# Altium PCB rk3288_backend.PcbDoc (part 2 of 3)
Units mm, origin at the board's own origin, x right, y up, seen from the top; angles counter-clockwise.
Board outline 46.39 x 100.03 mm, 4 copper layers (Top Layer, horizontal, vertical, Bottom Layer), stack 0.778 mm thick; 208 components, 207 nets, 778 pads, 333 vias.
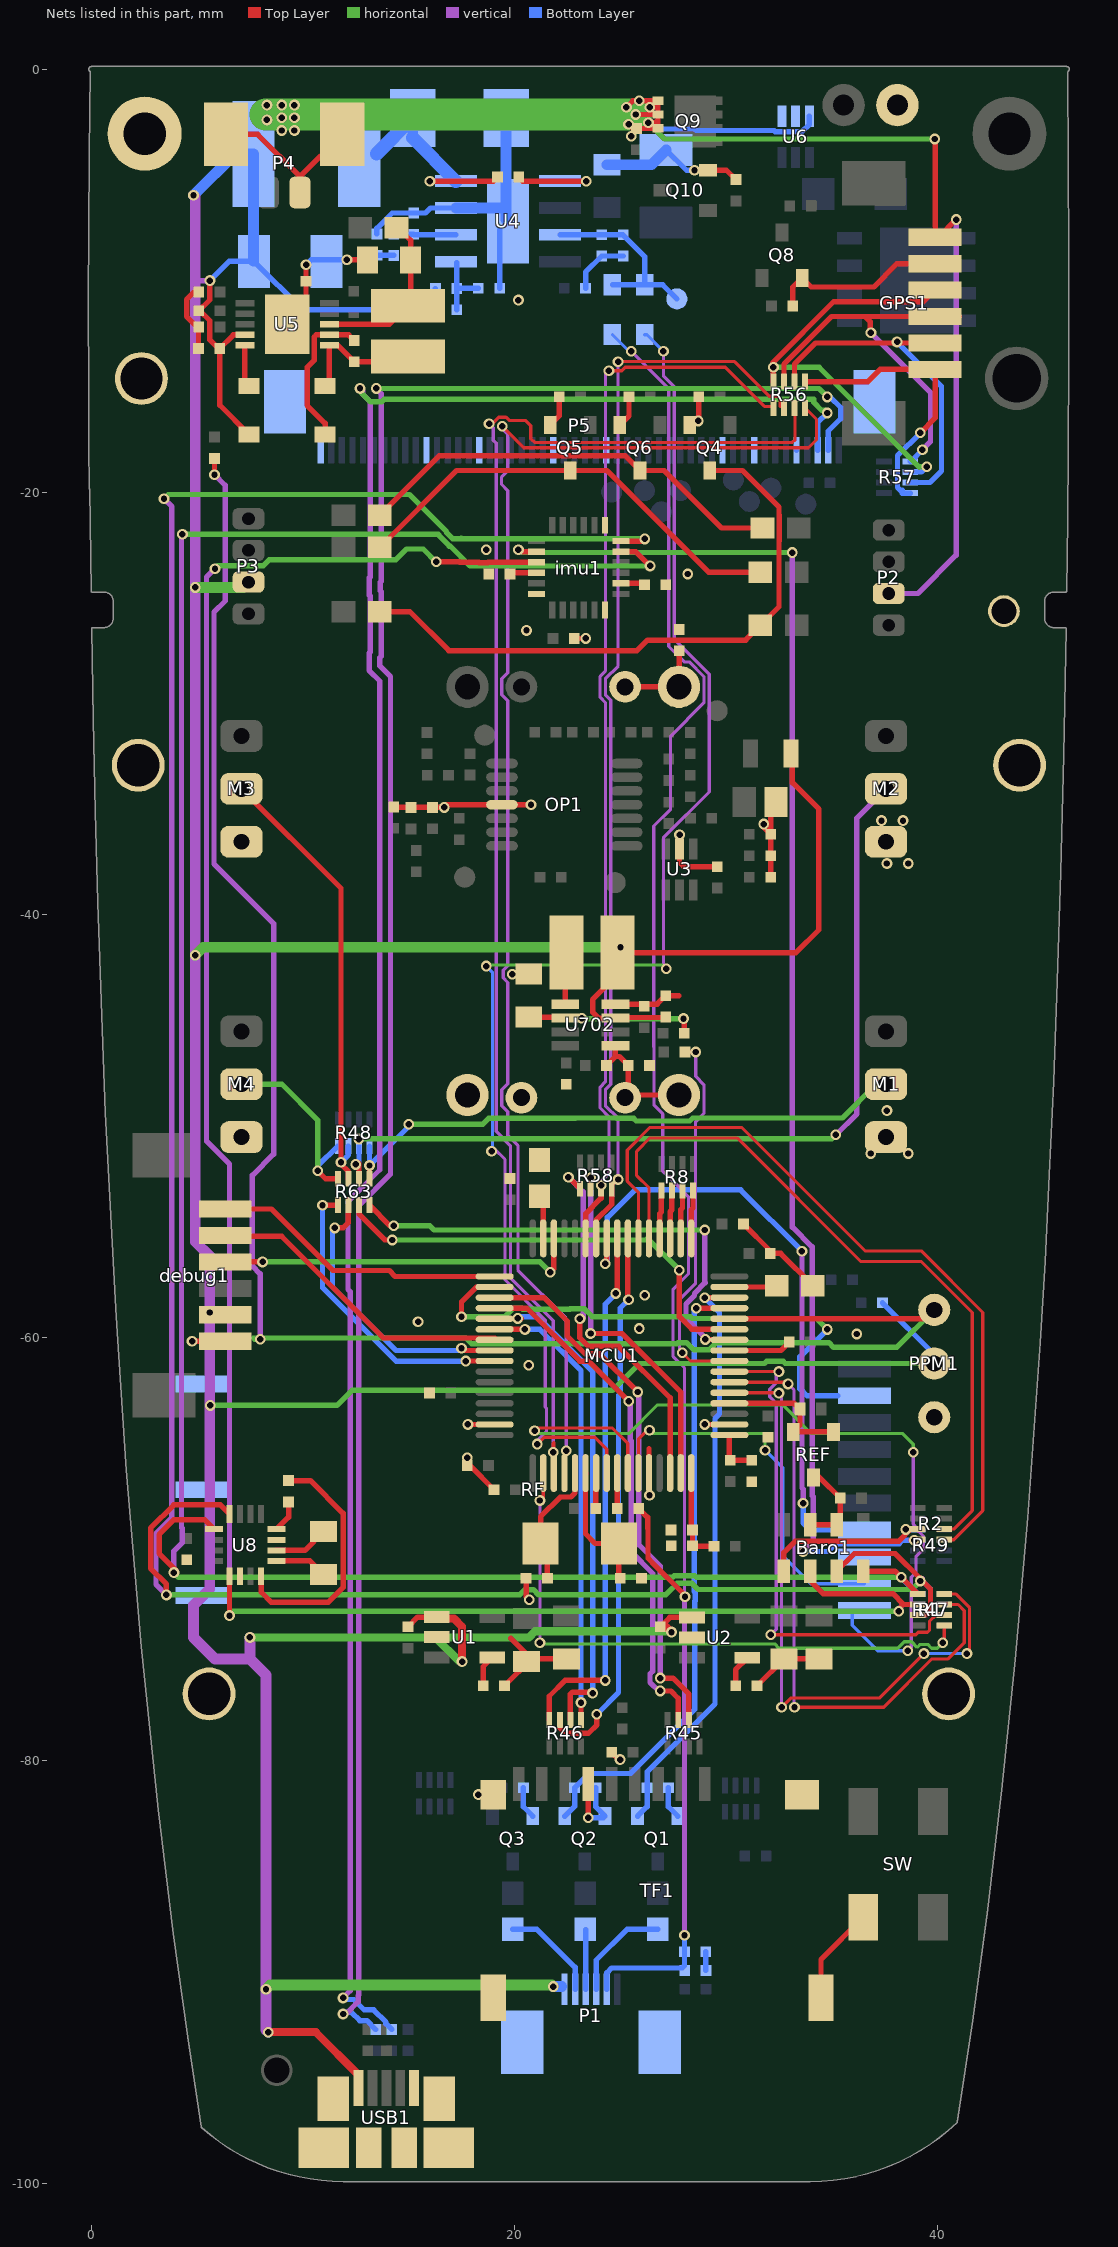
[diagram p4: the nets of this part, all layers, seen from the top]

## Via types
v1: diameter 0.508, hole 0.305, Top Layer to Bottom Layer, 289 vias
v2: diameter 0.508/0.508/0.508/0.508 (per signal layer), hole 0.305, Top Layer to Bottom Layer, 44 vias

## Nets (pads, with @x,y where several pads share a name; then routed paths per layer and width w, separated by ;. In a path a pad name is that pad's centre, name@x,y a point inside that pad or via, vN(x,y) a via of type N, cw(c..) or ccw(c..) an arc to the next point about the centre after c; other vN are vias at no path point) (continued)
5V: C20.1 C21.1 C35.1 C702.1 D5.3 debug1.5 GPS1.1 L1.2 L701.1 P1.6 P2.2 P3.2 PPM1.2 Q9.S R10.1 R11.1 R14.1 R25.1 R41.2 R?.1@37.408,-58.345 rx-L1.1 U1.1 U2.1 U5.4 U6.3 U702.3 USB1.1 | length 332
  Top Layer w0.254: R25.1@5.067,-11.43 R25.1@5.07,-11.43 ; v1(5.588,-58.801) 5.695,-58.908 debug1.5@6.329,-58.908 ; v1(5.6,-10) 5.6,-10.178 5.593,-10.185 5.593,-10.907 R25.1@5.07,-11.43 ; C35.1@6.008,-13.208 5.6,-12.8 5.6,-12.555 5.593,-12.548 5.593,-11.886 5.137,-11.43 R25.1@5.07,-11.43 ; U5.4@7.25,-12.565 6.71,-12.565 C35.1@6.067,-13.208 6.067,-15.889 D5.3@7.45,-17.272 ; R10.1@14.965,-73.668 15.428,-73.205 U1.1@16.332,-73.205 ; L701.1@24.871,-42.829 23.7,-44 23.7,-44.6 23.982,-44.882 U702.3@24.776,-44.882 24.776,-44.848 C702.1@27.132,-44.848 ; L701.1@24.871,-41.783 33.317,-41.783 34.4,-40.7 34.4,-34.995 33.147,-33.742 rx-L1.1@33.147,-32.512 ; v1(25.3,-1.8) 25.606,-1.494 v1(25.906,-1.494) Q9.S@26.793,-1.494 26.793,-1.8 ; v1(25.4,-2.6) 25.609,-2.809 R41.2@25.777,-2.809 ; v1(25.527,-3.175) 25.527,-3.141 25.486,-3.1 R41.2@25.777,-2.809 ; v1(25.744,-2.144) Q9.S@26.793,-2.144 ; v1(26.34,-2.54) 26.653,-2.54 26.793,-2.4 ; v1(26.4,-1.8) 26.793,-1.8 ; Q9.S@26.778,-2.809 R41.2@25.777,-2.809 ; Q9.S@26.793,-2.794 26.793,-2.4 ; R11.1@26.903,-73.668 27.353,-73.218 U2.1@28.397,-73.218 ; v1(39.878,-3.302) 39.9,-3.324 GPS1.1@39.9,-7.95 40.056,-7.95 v1(40.894,-7.112) ; 26.793,-2.4 Q9.S@26.793,-2.144 ; Q9.S@26.793,-2.144 26.793,-1.8
  Top Layer w0.381: v1(8.358,-92.838) 10.61,-92.838 12.629,-94.856 USB1.1@12.629,-95.479 ; U1.1@16.332,-73.205 16.406,-73.279 17.145,-73.279 17.526,-73.66 v1(17.526,-75.311) ; R11.1@26.903,-73.668 27.186,-73.668 v1(27.432,-73.914)
  vertical w0.254: 4.91,-10.033 4.943,-10 v1(5.6,-10) ; P2.2@37.7,-24.8 39.081,-24.8 40.894,-22.987 v1(40.894,-7.112)
  vertical w0.508: v1(4.826,-5.969) 4.91,-6.053 4.91,-10.033 v1(4.91,-24.511) v1(4.91,-41.91) 4.91,-55.456 5.588,-56.134 v1(5.588,-58.801) 5.588,-71.882 4.826,-72.644 4.826,-74.168 5.842,-75.184 7.493,-75.184 ; v1(7.493,-74.168) 7.493,-75.184 ; v1@8.255,-90.678 v1(8.255,-90.805) ; v1(8.358,-92.838) 8.255,-92.735 v1(8.255,-90.805) ; 7.493,-75.184 8.255,-75.946 v1(8.255,-90.805)
  horizontal w0.254: v1(5.615,-63.196) 11.607,-63.196 12.319,-62.484 24.638,-62.484 25.908,-61.214 31.829,-61.214 31.931,-61.112 32.712,-61.112 32.813,-61.214 PPM1.2@39.857,-61.214 ; v1@25.4,-2.488 v1(25.4,-2.6) 25.755,-2.955 25.535,-3.175 v1(25.527,-3.175) ; v1(26.34,-2.54) 27.102,-3.302 v1(39.878,-3.302)
  horizontal w0.381: v1(7.493,-74.168) 16.256,-74.168 ; v1(17.526,-75.311) 17.399,-75.311 16.256,-74.168 ; v1(27.432,-73.914) 27.394,-73.876 20.983,-73.876 20.691,-74.168 16.256,-74.168
  horizontal w0.508: v1(4.91,-41.91) 5.291,-41.529 v1(25.019,-41.529) ; v1(4.91,-24.511) 7.172,-24.511 P3.2@7.424,-24.259 ; v1(8.255,-90.805) 8.454,-90.606 21.772,-90.606 v1(21.844,-90.678)
  horizontal w1.524: 8.244,-2.144 v1(25.744,-2.144)
  Bottom Layer w0.254: v1(5.6,-10) 6.51,-9.09 C21.1@7.684,-9.09 9.97,-11.376 R14.1@16.265,-11.376 C20.1@16.265,-10.373 ; v1(26.34,-2.54) 26.63,-2.83 28.524,-2.83 28.598,-2.904 32.291,-2.904 32.345,-2.959 33.605,-2.959 33.95,-2.613 U6.3@33.95,-2.23 ; R?.1@37.408,-58.345 PPM1.2@39.857,-60.794
  Bottom Layer w0.508: v1(4.826,-5.969) 6.785,-4.01 L1.2@7.661,-4.01 C21.1@7.661,-9.067 ; v1(21.844,-90.678) P1.6@22.239,-90.678
  other v1: 9,-2.9 9.6,-2.9 8.3,-2.4 9,-2.3 9.6,-2.3 8.3,-1.7 9,-1.7 9.6,-1.7
3288_OTG_N: P5.2 R53.2 | length 104.8
  vertical w0.254: v1(11.9,-91.977) 12.036,-91.977 12.617,-91.395 12.617,-91.1 12.641,-91.076 12.641,-53.76 14.141,-52.26 14.141,-28.723 13.642,-28.224 13.642,-27.824 13.7,-27.766 13.7,-24.715 13.651,-24.666 13.651,-24.266 13.7,-24.217 13.7,-15.338 v1(13.462,-15.1)
  horizontal w0.254: v1(13.462,-15.1) 34.4,-15.1 v1(34.8,-15.5)
  Bottom Layer w0.254: v1(11.9,-91.977) 11.976,-91.9 12.3,-91.9 12.69,-92.291 13.022,-92.291 R53.2@13.441,-92.71 ; v1(34.8,-15.5) 34.936,-15.5 35.435,-15.999 35.435,-16.525 34.843,-17.117 P5.2@34.843,-18.014
3288_OTG_P: P5.3 R54.2 | length 105.2
  vertical w0.254: v1(11.9,-91.215) 12.236,-90.878 12.236,-57.813 12.133,-57.71 12.133,-53.549 13.633,-52.05 13.633,-28.934 13.134,-28.435 13.134,-27.614 13.192,-27.555 13.192,-24.925 13.143,-24.877 13.143,-24.056 13.192,-24.007 13.192,-15.728 12.827,-15.363 12.827,-15.227 v1(12.7,-15.1)
  horizontal w0.254: v1(12.7,-15.1) 12.7,-15.236 13.199,-15.735 13.725,-15.735 13.852,-15.608 34.165,-15.608 34.165,-15.763 34.537,-16.135 34.673,-16.135 v1(34.8,-16.262)
  Bottom Layer w0.254: v1(11.9,-91.215) 11.976,-91.292 12.409,-91.292 12.9,-91.783 13.345,-91.783 13.924,-92.361 13.924,-92.431 R54.2@14.203,-92.71 ; P5.3@34.343,-18.014 34.343,-16.719 v1(34.8,-16.262)
_EYEB: Q6.1 R35.2 R38.2 | length 20.7
  Top Layer w0.254: R35.2@13.636,-21.087 16.435,-18.288 25.247,-18.288 Q6.1@25.94,-18.981 27.081,-18.981 29.8,-21.7 R38.2@31.736,-21.7
_EYEG: Q5.1 R34.2 R37.2 | length 21.5
  Top Layer w0.254: R34.2@13.636,-22.611 17.266,-18.981 Q5.1@22.642,-18.981 24.381,-18.981 29.2,-23.8 R37.2@31.636,-23.8
_EYER: Q4.1 R33.2 R36.2 | length 29.2
  Top Layer w0.254: R33.2@13.636,-25.659 15.059,-25.659 16.9,-27.5 25.8,-27.5 26.3,-27 30.936,-27 R36.2@31.636,-26.3 32.513,-25.423 32.513,-22.313 32.524,-22.303 32.524,-21.097 32.513,-21.087 32.513,-20.713 30.781,-18.981 Q4.1@29.244,-18.981
_TAILB: P1.5 R32.1 | length 4.7
  Bottom Layer w0.254: R32.1@19.918,-87.972 21.072,-87.972 22.871,-89.771 P1.5@22.871,-90.805
_TAILG: P1.4 R31.1 | length 2.8
  Bottom Layer w0.254: P1.4@23.371,-90.805 R31.1@23.371,-87.996
_TAILR: P1.3 R30.1 | length 4.9
  Bottom Layer w0.254: P1.3@23.871,-90.805 23.871,-89.429 25.328,-87.972 R30.1@26.776,-87.972
GND: 3288-.1 Baro1.2 Baro1.3 Bat-.1 C1.2 C2.2 C3.2 C4.1 C5.1 C6.1 C7.1 C8.1 C9.1 C10.2 C11.2 C12.2 C13.2 C14.2 C15.2 C16.2 C17.2 C18.2 C21.2 C22.2 C23.2 C24.1 C25.2 C26.2 C27.1 C29.2 C30.1 C31.1 C32.2 C33.2 C35.2 C36.2 C37.1 C702.2 C703.2 C704.2 D1.1 D6.1 debug1.6 GPS1.2 imu1.1 imu1.18 M1.3 M2.3 M3.3 M4.3 MCU1.12 MCU1.18 MCU1.63 P1.0 P4.0 P4.2 P5.0 P5.5 P5.9 P5.12 P5.23 P5.28 P5.35 P5.40 P5.50 pad.0@43.891,-32.918 pad.1 pad.2 pad.3@5.564,-76.836 pad.3@43.155,-25.629 PPM1.1 Q1.2 Q2.2 Q3.2 Q4.2 Q5.2 Q6.2 Q8.2 Q10.2 R3.1 R7.2 R16.1 R17.2 R18.2 R19.2 R20.2 R21.2 R22.2 R23.2 R24.2 R26.2 R28.1 R29.1 R40.2 R42.2 R43.1 R64.1 R702.2 R706.2 REF.3 RF.0 RF.8 SW.1 TF1.6 TF1.SHELL TX1.2 TX2.2 U1.2 U2.2 U4.0 U4.7 U5.0 U6.1 U6.2 U8.6 U8.9 U8.11 U702.4 USB1.5 | length 99.6
  Top Layer w0.254: v1(4.758,-60.158) debug1.6@6.329,-60.158 ; C35.2@5.059,-13.208 5.059,-12.2 5,-12.2 4.5,-11.7 4.5,-10.9 4.859,-10.541 R28.1@5.067,-10.541 ; P4.0@6.361,-3.084 7.861,-3.084 P4.2@9.861,-5.084 ; U8.9@8.753,-70.549 10.327,-70.549 C27.1@10.974,-71.196 ; P4.2@9.861,-5.834 P4.2@9.861,-5.084 ; U5.0@10.147,-11.168 R29.1@10.147,-10.033 v1(10.147,-9.253) ; P4.0@11.861,-3.084 P4.2@9.861,-5.084 ; v1(12.083,-9.017) C36.2@13.06,-9.017 ; U1.2@16.332,-74.155 U1.2@16.377,-74.2 ; v1(17.767,-65.667) C9.1@17.767,-66.04 17.894,-66.04 C8.1@19.037,-67.183 ; v1(17.804,-64.096) MCU1.63@19.067,-64.096 ; v1(18.3,-81.6) TF1.SHELL@19,-81.6 ; C16.2@19.537,-76.454 C13.2@20.807,-75.184 ; 19.823,-74.2 C13.2@20.807,-75.184 ; v1(19.901,-42.799) C704.2@20.68,-42.799 ; C2.2@20.553,-71.374 20.553,-72.242 v1(20.701,-72.39) ; Q5.2@21.692,-16.831 22.121,-16.402 R23.2@22.121,-15.493 ; C12.2@22.471,-75.184 C13.2@20.807,-75.184 ; C30.1@22.831,-26.924 v1(23.376,-26.924) ; v1(23.5,-82.7) TF1.6@23.5,-81.1 ; C37.1@24.6,-79.6 25,-80 25,-79.946 v1(24.998,-79.944) ; U702.4@24.776,-44.221 26.751,-44.221 C702.2@27.157,-43.815 27.785,-43.815 ; Q6.2@24.99,-16.831 25.419,-16.402 R24.2@25.419,-15.493 ; MCU1.12@26.367,-66.396 26.367,-65.233 ; Q4.2@28.294,-16.831 28.723,-16.402 R22.2@28.723,-15.493 ; v1(28.52,-4.78) Q10.2@29.151,-4.78 30.034,-4.78 R42.2@30.476,-5.222 ; v1(29.004,-64.096) MCU1.18@30.167,-64.096 ; C4.1@30.832,-54.61 C6.1@32.102,-55.88 ; C17.2@31.475,-76.454 C14.2@32.745,-75.184 C15.2@34.409,-75.184 ; C6.1@32.102,-56.007 32.593,-56.007 C10.2@34.117,-57.531 ; R40.2@33.165,-11.205 33.165,-10.309 Q8.2@33.607,-9.867 34.04,-10.3 37,-10.3 38.1,-9.2 GPS1.2@39.9,-9.2 ; Baro1.3@33.995,-68.834 Baro1.2@35.245,-68.834 35.412,-68.667 C32.2@35.412,-67.577 34.429,-66.594 REF.3@34.142,-66.594 ; TF1.SHELL@34.5,-91.2 34.5,-89.4 SW.1@36.5,-87.4
  vertical w0.254: v1@12,-9.1 v1(12.083,-9.017) ; v1(24.998,-79.944) v1@25.054,-80
  Bottom Layer w0.254: v1(10.147,-9.253) 10.383,-9.017 v1(12.083,-9.017) ; C25.2@13.5,-7.792 13.5,-7.529 14.225,-6.804 C23.2@15.241,-6.804 15.796,-6.804 16.035,-6.565 U4.7@17.236,-6.565 ; R17.2@19.305,-10.36 U4.0@19.305,-7.595 ; R21.2@20.426,-81.28 20.426,-82.176 Q3.2@20.868,-82.618 ; R19.2@23.369,-10.36 23.369,-9.598 C33.2@24.131,-8.836 R18.2@25.147,-8.836 ; v1(23.5,-82.7) Q2.2@24.202,-82.7 ; R20.2@23.855,-81.28 23.855,-82.189 Q2.2@24.284,-82.618 ; C22.2@27.179,-3.819 28.14,-4.78 v1(28.52,-4.78) ; R7.2@27.284,-81.28 27.284,-82.176 Q1.2@27.726,-82.618 ; R26.2@29.054,-89.908 D6.1@29.054,-89.027 ; P5.5@33.317,-17.988 P5.5@33.343,-18.014
  Bottom Layer w0.508: U4.7@17.236,-6.565 U4.0@19.575,-6.565 ; U4.0@19.61,-7.11 D1.1@19.61,-2.3 ; C1.2@24.385,-4.518 26.48,-4.518 C22.2@27.179,-3.819
  other v1: 26.392,-67.438
  other v2: 20.677,-61.291 36.195,-59.817 25.908,-59.563 15.445,-59.234 26.163,-57.989 36.855,-51.283 38.633,-51.283 37.617,-49.251 37.617,-37.567 38.633,-37.567 37.363,-35.535 38.379,-35.535 20.574,-26.543 28.194,-23.876 18.669,-22.733 28.702,-16.637 20.193,-10.922
GND-RX: OP1.11 R64.2 RX1.1 RX2.1 RX-C7.2 RX-C8.2 RX-R15.1 RX-R20.1 RXC-1.1 RXC-2.1 RXC-3.1 RXC-4.1 U3.2 | length 17.8
  Top Layer w0.254: RX-C8.2@14.3,-34.914 RX-C7.2@16.127,-34.914 v1(16.686,-34.914) ; v1@16.813,-34.787 OP1.11@19.413,-34.787 v1(20.787,-34.787) ; RX2.1@25.235,-29.21 RX1.1@27.785,-29.21 27.8,-29.195 R64.2@27.8,-27.508 ; v1(27.811,-36.211) U3.2@27.811,-36.878 27.811,-37.511 28.016,-37.716 RX-R20.1@29.589,-37.716 ; v1(31.8,-35.7) 31.763,-35.7 31.7,-35.763 RXC-4.1@32.121,-36.184 ; RXC-2.1@32.121,-38.216 RXC-3.1@32.121,-37.2 RXC-4.1@32.121,-36.184 ; RXC-1.1@32.121,-34.91 RXC-4.1@32.121,-36.184
NetBaro1_5: Baro1.5 R2.7 R49.8 | length 8.3
  Top Layer w0.254: Baro1.5@32.745,-71.034 32.745,-70.155 33.287,-69.613 38.187,-69.613 38.475,-69.325 38.475,-69.311 38.74,-69.046 R2.7@39.078,-69.046
  Bottom Layer w0.254: v1(38.507,-69.062) R49.8@39.078,-69.062
NetBaro1_6: Baro1.6 imu1.9 R1.2 R47.7 U8.5 | length 106.5
  Top Layer w0.254: v1(6.528,-73.134) U8.5@6.528,-71.274 ; v1(16.3,-23.3) 17.4,-23.3 17.418,-23.318 18.318,-23.318 18.342,-23.343 18.742,-23.343 18.766,-23.318 imu1.9@21.039,-23.318 ; Baro1.6@33.995,-71.495 34.6,-72.1 37.9,-72.1 38.41,-72.61 ; v1(38.178,-72.924) 38.178,-72.822 38.39,-72.61 38.41,-72.61 ; R1.2@39.078,-72.61 38.41,-72.61
  vertical w0.254: v1(5.842,-23.622) 5.437,-24.027 5.437,-50.697 6.528,-51.789 v1(6.528,-73.134)
  horizontal w0.254: v1@5.976,-23.488 8.122,-23.488 8.41,-23.2 14.392,-23.2 14.902,-22.69 15.69,-22.69 v1(16.3,-23.3) ; v1(6.528,-73.134) 6.528,-73.086 6.691,-72.924 v1(38.178,-72.924)
  Bottom Layer w0.254: v1(38.178,-72.924) 38.178,-72.822 38.39,-72.61 R47.7@39.078,-72.61
NetBaro1_7: Baro1.7 imu1.24 R1.3 R47.6 U8.16 | length 130.9
  Top Layer w0.254: v1(3.544,-72.156) 3.544,-71.644 2.8,-70.9 2.8,-69 3.9,-67.9 6.104,-67.9 U8.16@6.528,-68.324 ; imu1.24@25.039,-22.318 v1@26.06,-22.318 ; Baro1.7@35.245,-71.034 36.079,-70.2 38.007,-70.2 39.2,-71.393 v1(39.2,-71.5) 39.307,-71.5 39.682,-71.875 39.682,-72.829 39.726,-72.873 39.49,-73.11 R1.3@39.078,-73.11
  vertical w0.254: v1(3.429,-20.32) 3.8,-20.691 3.8,-68.505 3.049,-69.255 3.049,-71.662 v1(3.544,-72.156) ; v1(39.2,-71.5) v1@39.3,-71.4
  horizontal w0.254: v1(3.429,-20.32) 3.632,-20.117 15.035,-20.117 16.789,-21.872 16.789,-21.917 17.072,-22.2 17.472,-22.2 17.489,-22.183 17.5,-22.183 17.533,-22.216 v1(26.162,-22.216) ; v1(3.544,-72.156) 20.252,-72.156 20.501,-71.907 20.901,-71.907 21.15,-72.156 27.151,-72.156 27.628,-71.68 27.699,-71.608 28.394,-71.608 28.465,-71.68 28.685,-71.9 38.8,-71.9 v1(39.2,-71.5)
  Bottom Layer w0.254: v1(39.2,-71.5) 39.307,-71.5 39.682,-71.875 39.682,-72.845 R47.6@39.436,-73.091
NetBaro1_8: Baro1.8 imu1.23 R1.1 R47.8 U8.1 | length 117.6
  Top Layer w0.254: v1(3.9,-71.1) 4,-71 3.2,-70.2 3.2,-69.3 3.9,-68.6 5.354,-68.6 U8.1@5.803,-69.049 ; imu1.23@25.039,-22.818 25.739,-22.818 v1(26.416,-23.495) ; Baro1.8@36.495,-71.034 38.002,-71.034 R1.1@39.078,-72.11
  vertical w0.254: v1(3.9,-71.1) 3.9,-70.083 4.291,-69.692 4.291,-69.009 4.259,-68.978 4.259,-22.041 v1(4.3,-22)
  horizontal w0.254: v1(3.9,-71.1) 4.124,-71.324 27.481,-71.324 27.552,-71.253 28.541,-71.253 28.612,-71.324 v1(38.292,-71.324) ; v1(4.3,-22) 16.412,-22 16.434,-22.022 16.434,-22.064 16.925,-22.555 16.967,-22.555 17.907,-23.495 v1(26.416,-23.495)
  Bottom Layer w0.254: v1(38.292,-71.324) R47.8@39.078,-72.11
NetC2_1: C2.1 MCU1.5 Y1.2 | length 5.6
  Top Layer w0.254: Y1.2@21.243,-69.723 21.243,-68.457 22.175,-67.525 22.675,-67.525 22.867,-67.333 MCU1.5@22.867,-66.396 ; C2.1@21.561,-71.374 Y1.2@21.561,-70.041
NetC3_1: C3.1 MCU1.6 Y1.1 | length 6.2
  Top Layer w0.254: MCU1.6@23.367,-66.396 23.365,-66.399 23.365,-69.265 23.823,-69.723 Y1.1@24.943,-69.723 C3.1@24.943,-71.311
NetC10_1: C10.1 MCU1.31 | length 2.2
  Top Layer w0.254: MCU1.31@30.167,-57.596 C10.1@32.338,-57.596
NetC11_1: C11.1 MCU1.47 | length 1.8
  Top Layer w0.254: MCU1.47@21.367,-55.296 C11.1@21.367,-53.48
NetC16_1: C16.1 U1.4 | length 1.5
  Top Layer w0.254: C16.1@18.529,-76.454 18.529,-75.544 U1.4@18.953,-75.12
NetC17_1: C17.1 U2.4 | length 1.5
  Top Layer w0.254: C17.1@30.467,-76.454 30.467,-75.684 U2.4@31.018,-75.133
NetC18_1: C18.1 MCU1.17 R12.2 | length 2.2
  Top Layer w0.254: MCU1.17@30.167,-64.596 30.167,-65.748 R12.2@30.205,-65.786 30.213,-65.794 C18.1@31.221,-65.794
NetC19_1: C19.1 D1.2 L1.1 U4.8 | length 10.8
  Top Layer w0.254: v1(16.005,-5.295) 19.005,-5.295 C19.1@19.2,-5.1
  Bottom Layer w0.254: v1(16.005,-5.295) U4.8@17.236,-5.295
  Bottom Layer w0.508: D1.2@15.19,-3.249 D1.2@15.19,-2.3
  Bottom Layer w0.635: L1.1@13.48,-4.01 D1.2@15.19,-2.3 ; D1.2@15.19,-3.249 U4.8@17.236,-5.295
NetC19_2: C19.2 U4.1 | length 4.5
  Top Layer w0.254: C19.2@20.208,-5.1 20.403,-5.295 v1(23.395,-5.295)
  Bottom Layer w0.254: U4.1@22.164,-5.295 v1(23.395,-5.295)
NetC20_2: C20.2 R14.2 R17.1 U4.5 | length 3.2
  Bottom Layer w0.254: R14.2@17.273,-11.376 C20.2@17.273,-10.373 U4.5@17.273,-9.142 ; C20.2@17.286,-10.36 R17.1@18.297,-10.36
NetC23_1: C23.1 R15.1 U4.6 | length 2.9
  Bottom Layer w0.254: R15.1@14.3,-7.8 C23.1@15.229,-7.8 ; C23.1@15.264,-7.835 U4.6@17.236,-7.835
NetC25_1: C25.1 R15.2 | length 0.8
  Bottom Layer w0.254: C25.1@13.5,-8.8 R15.2@14.292,-8.8
NetC26_1: C26.1 MCU1.16 R13.2 R16.2 | length 4.5
  Top Layer w0.254: MCU1.16@28.367,-66.396 28.367,-69.036 C26.1@28.419,-69.088 28.427,-69.096 R16.2@28.427,-69.837 28.44,-69.85 R13.2@29.443,-69.85
NetC27_2: C27.2 U8.10 | length 2.6
  Top Layer w0.254: U8.10@8.753,-70.049 10.089,-70.049 C27.2@10.974,-69.164
NetC28_1: C28.1 U8.12 | length 1.5
  Top Layer w0.254: U8.12@8.753,-69.049 9.323,-68.479 C28.1@9.323,-67.759
NetC28_2: C28.2 U8.8 | length 11.8
  Top Layer w0.254: U8.8@8.028,-71.274 8.028,-72.028 8.5,-72.5 11.2,-72.5 11.9,-71.8 11.9,-68.3 10.351,-66.751 C28.2@9.323,-66.751
NetC29_1: C29.1 imu1.20 | length 1
  Top Layer w0.254: imu1.20@25.039,-24.318 C29.1@26.083,-24.318
NetC31_2: C31.2 imu1.10 | length 1.2
  Top Layer w0.254: C31.2@19.849,-23.818 imu1.10@21.039,-23.818
NetC33_1: C33.1 D3.2 D4.2 R18.1 T13.1 U4.3 | length 9.1
  Bottom Layer w0.254: U4.3@22.164,-7.835 25.14,-7.835 26.163,-8.858 D3.2@26.163,-10.196 ; D4.2@24.639,-10.196 D3.2@26.163,-10.196 ; T13.1@27.687,-10.868 27.015,-10.196 D3.2@26.163,-10.196
NetC34_1: C34.1 D2.1 L2.1 U5.6 | length 5.5
  Top Layer w0.254: D2.1@11.25,-14.786 U5.6@11.25,-13.065 11.655,-13.065 C34.1@12.425,-13.835 L2.1@14.719,-13.835
NetC34_2: C34.2 D5.1 U5.7 | length 7.1
  Top Layer w0.254: D5.1@11.05,-17.272 11.05,-16.75 10.2,-15.9 10.2,-14.1 10.529,-13.771 10.529,-12.671 10.635,-12.565 U5.7@11.25,-12.565 12.163,-12.565 C34.2@12.425,-12.827
NetC36_1: C36.1 L2.2 R5.1 U5.8 | length 8
  Top Layer w0.254: U5.8@11.25,-12.065 14.089,-12.065 L2.2@14.965,-11.189 ; R5.1@14.425,-7.5 14.5,-7.5 15.092,-8.092 C36.1@15.092,-9.017 L2.2@15.092,-11.062
NetC703_1: C703.1 R703.1 TX1.1 TX2.1 U702.1 | length 5.7
  Top Layer w0.254: R703.1@24.355,-47.117 24.776,-46.696 ; U702.1@24.776,-46.187 24.776,-46.696 ; TX1.1@27.785,-48.514 25.412,-48.514 25.387,-48.489 C703.1@25.387,-47.117 24.966,-46.696 24.776,-46.696
NetC704_1: C704.1 R705.1 U702.6 | length 8
  Top Layer w0.254: C704.1@20.68,-44.831 U702.6@22.357,-44.831 ; U702.6@22.408,-44.882 v1(23.182,-44.882) ; v1(28,-44.9) 28.038,-44.938 R705.1@28.038,-45.593
  horizontal w0.254: v1(23.182,-44.882) 23.2,-44.9 v1(28,-44.9)
NetD2_3: D2.3 U5.5 | length 1.7
  Top Layer w0.254: D2.3@7.25,-14.786 U5.5@7.25,-13.065
NetD3_1: D3.1 MCU1.8 | length 70
  Top Layer w0.152: v1(21.082,-65.024) 21.408,-64.698 23.804,-64.698 24.367,-65.261 MCU1.8@24.367,-66.396
  vertical w0.152: v1(18.923,-51.181) 19.05,-51.054 19.558,-51.562 19.558,-57.255 21.463,-59.16 21.463,-63.271 21.514,-63.322 21.514,-64.441 21.082,-64.873 v1(21.082,-65.024) ; v1(27.051,-13.335) 27.051,-14.502 27.559,-15.01 27.559,-26.959 29.217,-28.617 29.217,-34.184 27.051,-36.35 27.051,-42.545 v1(27.178,-42.545)
  horizontal w0.152: v1(18.669,-42.418) 18.72,-42.367 27,-42.367 v1(27.178,-42.545)
  Bottom Layer w0.152: v1(18.669,-42.418) 18.963,-42.712 18.963,-51.141 v1(18.923,-51.181) ; D3.1@26.163,-12.556 26.272,-12.556 v1(27.051,-13.335)
NetD4_1: D4.1 D6.2 P1.2 R26.1 R44.1 | length 91
  Top Layer w0.254: R44.1@25.879,-68.072 26.3,-68.493 26.3,-69 26.317,-69.017 26.317,-70.417 26.512,-70.612 26.512,-70.615 28.046,-72.149 28.068,-72.171 v1(28.068,-72.238)
  vertical w0.152: v1(25.526,-13.336) 27.305,-15.115 27.305,-27.305 28.032,-28.032 28.273,-28.032 28.963,-28.722 28.963,-29.965 27.387,-31.541 27.387,-35 26.594,-35.794 26.594,-46.228 26.608,-46.242 26.608,-49.002 27.014,-49.408 27.014,-52.111 27.267,-52.364 27.371,-52.364 27.459,-52.452 27.459,-52.556 28.232,-53.329 28.232,-56.979 27.508,-57.702 27.508,-60.885 28.046,-61.423 v1@28.046,-72.446
  vertical w0.254: v1(28.046,-88.254) v1@28.046,-72.446
  Bottom Layer w0.152: D4.1@24.639,-12.556 25.42,-13.336 v1(25.526,-13.336)
  Bottom Layer w0.254: P1.2@24.371,-90.805 24.371,-90.029 24.6,-89.8 27.938,-89.8 28.046,-89.692 D6.2@28.046,-89.027 v1(28.046,-88.254)
Netdebug1_1: debug1.1 MCU1.49 | length 14.1
  Top Layer w0.254: debug1.1@6.329,-53.908 8.508,-53.908 11.417,-56.817 14.086,-56.817 14.364,-57.096 MCU1.49@19.067,-57.096
Netdebug1_2: debug1.2 MCU1.55 | length 14.8
  Top Layer w0.254: debug1.2@6.371,-55.2 9,-55.2 13.808,-60.008 19.067,-60.008 MCU1.55@19.067,-60.096
Netdebug1_3: debug1.3 MCU1.46 | length 17.2
  Top Layer w0.254: debug1.3@6.329,-56.408 v1(8.092,-56.408) ; v1(21.7,-56.9) 21.867,-56.733 MCU1.46@21.867,-55.296
  horizontal w0.254: v1(8.092,-56.408) 21.208,-56.408 v1(21.7,-56.9)
NetGPS1_3: GPS1.3 R56.8 R57.6 | length 20.1
  Top Layer w0.254: R56.8@32.25,-14.775 v1(32.25,-14.097) 32.25,-13.85 35.1,-11 39.35,-11 GPS1.3@39.9,-10.45
  horizontal w0.254: v1(32.25,-14.097) 34.417,-14.097 39.12,-18.8 v1(39.5,-18.8)
  Bottom Layer w0.254: R57.6@38.725,-19.05 39.25,-19.05 v1(39.5,-18.8)
NetGPS1_4: GPS1.4 R56.7 R57.5 | length 18.6
  Top Layer w0.254: R56.7@32.75,-14.775 32.75,-13.947 34.997,-11.7 36.576,-11.7 ; v1(36.862,-12.467) 36.83,-12.436 36.83,-11.954 36.576,-11.7 ; GPS1.4@41.037,-11.7 GPS1.4@39.9,-11.7 36.576,-11.7
  vertical w0.254: v1(36.862,-12.467) 39.683,-15.288 39.683,-17.617 v1(39.3,-18)
  Bottom Layer w0.254: R57.5@38.725,-18.55 38.75,-18.55 v1(39.3,-18)
NetGPS1_5: GPS1.5 R56.6 R57.7 | length 16.6
  Top Layer w0.254: R56.6@33.25,-14.775 33.25,-13.95 34.25,-12.95 GPS1.5@39.9,-12.95
  Bottom Layer w0.254: v1(38.1,-12.9) 40.2,-15 40.2,-19 39.65,-19.55 R57.7@38.725,-19.55
NetGPS1_6: GPS1.6 R56.5 R57.8 | length 13.5
  Top Layer w0.254: R56.5@33.75,-14.775 36.725,-14.775 37.3,-14.2 GPS1.6@39.9,-14.2 39.9,-16.5 v1(39.2,-17.2)
  Bottom Layer w0.254: R57.8@38.725,-20.05 38.35,-20.05 38.35,-19.919 38.255,-19.919 38.121,-19.785 38.121,-18.279 v1(39.2,-17.2)
Netimu1_8: imu1.8 R2.8 R49.7 | length 67.8
  Top Layer w0.254: v1(20.193,-22.733) 20.278,-22.818 imu1.8@21.039,-22.818 ; v1(38.916,-69.566) 38.777,-69.566 38.757,-69.546 R2.8@39.078,-69.546
  vertical w0.254: v1(33.147,-22.86) 33.147,-54.765 34.083,-55.7 34.083,-67.462 34.138,-67.517 34.138,-69.621 v1(33.655,-70.104)
  horizontal w0.254: v1(20.193,-22.733) 20.193,-22.86 v1(33.147,-22.86)
  Bottom Layer w0.254: v1(33.655,-70.104) 34.834,-70.104 35.207,-69.73 38.197,-69.73 38.36,-69.566 v1(38.916,-69.566)
Netimu1_12: imu1.12
NetL701_2: L701.2 U702.5 | length 2.4
  Top Layer w0.254: U702.5@22.408,-44.221 L701.2@22.408,-41.847
NetM1_2: M1.2 R48.1 R63.1 | length 27.9
  Top Layer w0.254: R63.1@13.15,-52.475 v1(13.15,-51.85)
  horizontal w0.254: v1(15,-49.9) 18.5,-49.9 18.78,-49.62 20.741,-49.62 20.743,-49.617 22.882,-49.617 ; 22.882,-49.6 24.811,-49.6 24.83,-49.62 25.641,-49.62 25.764,-49.743 28.294,-49.743 28.437,-49.6 35.512,-49.6 37.106,-48.006 M1.2@37.579,-48.006
  Bottom Layer w0.254: R48.1@13.15,-50.925 v1(13.15,-51.85) 15.1,-49.9 v1(15,-49.9)
NetM2_2: M2.2 R48.2 R63.2 | length 42
  Top Layer w0.254: v1(12.5,-51.8) 12.55,-51.75 12.65,-51.75 R63.2@12.65,-52.475 ; v1@12.6,-50.6 v1(12.646,-50.6)
  vertical w0.254: v1(35.2,-50.4) 36.195,-49.405 36.195,-35.42 M2.2@37.579,-34.036
  horizontal w0.254: v1(12.646,-50.6) 12.6,-50.6 12.617,-50.583 35.017,-50.583 v1(35.2,-50.4)
  Bottom Layer w0.254: v1@12.5,-51.8 12.65,-51.65 R48.2@12.65,-50.925
NetM3_2: M3.2 R48.3 R63.3 | length 21.6
  Top Layer w0.254: M3.2@7.099,-34.036 11.8,-38.737 v1(11.8,-51.7) 11.7,-51.8 11.813,-51.8 12.15,-52.137 R63.3@12.15,-52.475
  Bottom Layer w0.254: v1(11.8,-51.7) 12.15,-51.35 R48.3@12.15,-50.925
NetM4_2: M4.2 R48.4 R63.4 | length 9.4
  Top Layer w0.254: v1(10.7,-52.1) 11.075,-52.475 R63.4@11.65,-52.475
  horizontal w0.254: M4.2@7.099,-48.006 9.006,-48.006 10.7,-49.7 v1(10.7,-52.1)
  Bottom Layer w0.254: v1(10.7,-52.1) 10.7,-51.875 R48.4@11.65,-50.925
NetMCU1_2: MCU1.2 R1.5 | length 28.8
  Top Layer w0.152: v1(21.209,-67.691) 21.305,-67.787 21.367,-67.787 MCU1.2@21.367,-66.396 ; v1(40.259,-74.422) 40.328,-74.226 R1.5@40.328,-73.61
  vertical w0.152: v1(21.209,-74.422) v1(21.209,-67.691)
  horizontal w0.152: v1(21.209,-74.422) 21.26,-74.473 32.31,-74.473 32.513,-74.676 38.124,-74.676 38.429,-74.371 38.787,-74.371 39.04,-74.624 39.065,-74.624 39.191,-74.498 39.549,-74.498 39.727,-74.676 40.005,-74.676 v1(40.259,-74.422)
NetMCU1_3: MCU1.3 R56.3 | length 68.8
  Top Layer w0.152: v1(18.804,-16.764) 18.947,-16.764 19.252,-16.459 19.61,-16.459 19.762,-16.612 20.522,-16.612 20.775,-16.865 20.775,-17.473 20.955,-17.653 33.147,-17.653 33.274,-17.526 R56.3@33.274,-16.049 ; v1(21.844,-65.405) 21.844,-64.975 21.867,-64.952 MCU1.3@21.867,-66.396
  vertical w0.152: v1(18.804,-16.764) 18.999,-16.959 18.999,-17.549 19.14,-17.69 19.14,-50.233 19.812,-50.905 19.812,-57.15 21.844,-59.182 v1(21.844,-65.405)
NetMCU1_4: MCU1.4 R56.4 | length 69.4
  Top Layer w0.152: v1(19.431,-16.891) 20.447,-17.907 33.909,-17.907 34.29,-17.526 34.29,-16.565 R56.4@33.75,-16.025 ; MCU1.4@22.367,-66.396 22.367,-65.259 v1(22.454,-65.345)
  vertical w0.152: v1@19.304,-16.764 v1@19.304,-16.891 ; v1(19.431,-16.891) v1@19.304,-16.891 ; v1(22.454,-65.345) 22.454,-59.225 22.352,-59.123 22.422,-59.053 20.166,-56.796 20.166,-50.9 19.685,-50.419 19.685,-49.303 19.408,-49.025 19.408,-48.257 19.685,-47.979 19.685,-43.194 19.469,-42.978 19.469,-42.62 19.685,-42.404 19.685,-29.872 19.408,-29.594 19.408,-28.826 19.685,-28.548 19.685,-19.933 19.394,-19.642 19.394,-19.285 19.685,-18.994 19.685,-17.272 v1@19.304,-16.891
NetMCU1_7: MCU1.7 R6.1 | length 1.7
  Top Layer w0.254: R6.1@23.847,-68.072 MCU1.7@23.847,-66.416
NetMCU1_9: MCU1.9 R44.2 | length 1.7
  Top Layer w0.254: R44.2@24.871,-68.072 MCU1.9@24.871,-66.4
NetMCU1_10: MCU1.10 RF.10 | length 39.6
  Top Layer w0.152: v1(20.955,-64.389) 21.082,-64.262 24.638,-64.262 25.367,-64.991 MCU1.10@25.367,-66.396
  vertical w0.152: v1(38.608,-74.803) 38.768,-74.643 38.768,-71.321 38.989,-71.1 38.989,-70.357 39.348,-69.998 39.348,-69.388 38.939,-68.978 38.939,-68.883 38.862,-68.806 v1(38.862,-65.405)
  horizontal w0.152: v1(20.955,-64.389) 21.094,-64.528 25.412,-64.528 26.769,-63.171 31.719,-63.171 31.725,-63.164 32.083,-63.164 32.089,-63.171 32.691,-63.171 34.048,-64.528 38.366,-64.528 38.862,-65.024 v1(38.862,-65.405)
  Bottom Layer w0.152: RF.10@35.984,-72.898 35.984,-73.596 37.19,-74.803 v1(38.608,-74.803)
NetMCU1_11: MCU1.11 RF.9 | length 18.4
  Top Layer w0.152: MCU1.11@25.867,-66.396 25.867,-64.787 26.29,-64.364 v1(26.392,-64.364)
  horizontal w0.152: v1(26.392,-64.364) 26.555,-64.528 31.813,-64.528 31.856,-64.571 v1(31.856,-65.31)
  Bottom Layer w0.152: v1@31.853,-65.306 v1(31.856,-65.31) 32.691,-66.144 32.691,-70.308 34.012,-71.629 RF.9@36.552,-71.629
NetMCU1_14: MCU1.14 R58.1 | length 17.9
  Top Layer w0.254: v1(22.556,-52.4) R58.1@23.105,-52.949 ; v1(23.1,-59.1) 23.1,-60 23.5,-60.4 24.935,-60.4 27.367,-62.833 MCU1.14@27.367,-66.396
  vertical w0.254: v1(22.556,-52.4) 23.25,-53.093 23.25,-59.05 23.2,-59.1 v1(23.1,-59.1)
  Bottom Layer w0.254: v1(23.1,-59.1) v1@23.2,-59.1
NetMCU1_15: MCU1.15 R58.2 | length 17.4
  Top Layer w0.254: v1(23.605,-59.795) 25.095,-59.795 27.867,-62.567 MCU1.15@27.867,-66.396 ; R58.2@23.605,-52.949 v1(23.605,-52.43) v1@23.605,-52.308
  vertical w0.254: v1(23.605,-59.795) v1(23.605,-52.43) v1@23.605,-52.308
NetMCU1_20: MCU1.20 R50.2 REF.1 REF.2 | length 6.6
  Top Layer w0.254: MCU1.20@30.167,-63.096 33.23,-63.096 R50.2@33.507,-63.373 33.507,-64.129 REF.2@33.192,-64.444 REF.1@35.092,-64.444
NetMCU1_21: MCU1.21 R1.8 | length 30.8
  Top Layer w0.152: MCU1.21@30.167,-62.596 32.497,-62.596 v1(32.512,-62.611) ; v1(32.639,-77.47) 33.07,-77.038 37.262,-77.038 v1(39.37,-74.93) ; R1.8@40.328,-72.11 40.868,-72.11 41.529,-72.771 41.529,-74.803 v1(41.402,-74.93)
  vertical w0.152: v1(32.512,-62.611) 32.639,-62.738 v1(32.639,-77.47)
  Bottom Layer w0.152: v1(39.37,-74.93) v1(41.402,-74.93)
NetMCU1_22: MCU1.22 R1.7 | length 30.1
  Top Layer w0.152: MCU1.22@30.167,-62.096 32.859,-62.096 v1(32.943,-62.18) ; v1(33.249,-77.47) 37.465,-77.47 39.751,-75.184 40.513,-75.184 41.275,-74.422 41.275,-72.898 40.987,-72.61 R1.7@40.328,-72.61
  vertical w0.152: v1(32.943,-62.18) 33.223,-62.46 33.223,-77.445 v1(33.249,-77.47)
NetMCU1_23: MCU1.23 R1.6 | length 24
  Top Layer w0.152: MCU1.23@30.167,-61.596 v1(32.512,-61.595) v1(32.512,-61.595) ; v1(32.131,-74.041) 37.91,-74.041 ; 37.911,-74.042 38.269,-74.042 ; 38.27,-74.041 38.99,-74.041 39.103,-73.928 39.527,-73.928 39.631,-73.824 39.631,-73.4 39.921,-73.11 R1.6@40.328,-73.11
  vertical w0.152: v1(32.131,-74.041) 32.385,-73.787 32.385,-63.095 32.08,-62.79 32.08,-62.432 32.385,-62.127 32.385,-61.722 v1(32.512,-61.595)
NetMCU1_24: MCU1.24 R701.2 | length 17.8
  Top Layer w0.152: v1(27.94,-60.706) 28.33,-61.096 MCU1.24@30.167,-61.096 ; R701.2@28.067,-46.482 v1(28.575,-46.482)
  vertical w0.152: v1(27.94,-60.706) 27.813,-60.579 27.813,-58.174 28.568,-57.418 28.568,-49.785 28.963,-49.39 28.963,-48.026 28.575,-47.638 v1(28.575,-46.482)
NetMCU1_25: MCU1.25 RX-R9.2 | length 3
  Top Layer w0.254: MCU1.25@30.167,-60.596 32.601,-60.596 RX-R9.2@32.999,-60.198
NetMCU1_26: MCU1.26 R63.8 | length 23.4
  Top Layer w0.254: R63.8@13.15,-53.725 14.125,-54.7 v1(14.3,-54.7) ; v1@29.046,-60.096 v1(29.025,-60.075) MCU1.26@30.146,-60.075
  vertical w0.254: v1(29,-54.9) 29,-57.368 29.025,-57.393 28.517,-57.9 28.517,-58 28.117,-58.4 28.117,-59.083 29.025,-59.99 v1(29.025,-60.075)
  horizontal w0.254: v1(14.3,-54.7) 16,-54.7 16.2,-54.9 v1(29,-54.9)
NetMCU1_27: MCU1.27 R63.7 | length 21.5
  Top Layer w0.254: R63.7@12.65,-53.725 12.65,-54.15 13.872,-55.372 v1(14.224,-55.372) ; v1(27.8,-56.8) 27.8,-59 28.392,-59.592 MCU1.27@30.164,-59.592
  horizontal w0.254: v1(14.224,-55.372) 26.228,-55.372 26.3,-55.3 v1(27.8,-56.8)
NetMCU1_28: MCU1.28 PPM1.3 R65.1 | length 86.9
  Top Layer w0.254: v1(5.818,-19.178) R65.1@5.818,-18.408 ; MCU1.28@30.167,-59.096 PPM1.3@39.435,-59.096
  vertical w0.254: v1(5.818,-19.178) 6.326,-19.686 6.326,-25.147 5.793,-25.68 5.793,-37.593 8.612,-40.412 8.612,-51.309 7.609,-52.312 7.609,-56.608 7.977,-56.976 v1(7.977,-60.072)
  horizontal w0.254: v1(7.977,-60.072) 7.723,-60.072 7.659,-60.008 17.713,-60.008 17.983,-60.277 27.686,-60.277 27.74,-60.223 28.14,-60.223 28.474,-60.558 29.225,-60.558 29.559,-60.223 34.871,-60.223 35.1,-60.453 38.079,-60.453 PPM1.3@39.857,-58.674
NetMCU1_29: MCU1.29 Q2.3 R20.1 | length 29.4
  Top Layer w0.254: v1(28.6,-58.6) 28.604,-58.596 MCU1.29@30.167,-58.596
  Bottom Layer w0.254: Q2.3@22.384,-82.618 22.847,-82.155 R20.1@22.847,-81.28 23.527,-80.6 25.5,-80.6 28.529,-77.571 28.529,-72.46 28.551,-72.438 28.551,-72.039 28.5,-71.987 28.5,-58.7 v1(28.6,-58.6)
NetMCU1_30: MCU1.30 Q1.3 R7.1 | length 27.6
  Top Layer w0.254: v1@29.004,-58.096 v1(29,-58.1) MCU1.30@30.163,-58.1
  Bottom Layer w0.254: Q1.3@25.826,-82.618 26.276,-82.168 R7.1@26.276,-81.28 26.276,-80.524 29.487,-77.313 29.487,-63.813 29.7,-63.6 29.7,-58.8 v1(29,-58.1)
NetMCU1_33: MCU1.33 R8.4 | length 2.3
  Top Layer w0.254: MCU1.33@28.367,-55.296 28.367,-53.933 28.45,-53.85 R8.4@28.45,-53.025
NetMCU1_34: MCU1.34 R8.3 | length 2.3
  Top Layer w0.254: MCU1.34@27.867,-55.296 27.867,-53.933 27.95,-53.85 R8.3@27.95,-53.025
NetMCU1_35: MCU1.35 R8.2 | length 2.3
  Top Layer w0.254: MCU1.35@27.367,-55.296 27.367,-54.033 27.45,-53.95 R8.2@27.45,-53.025
NetMCU1_36: MCU1.36 R8.1 | length 2.3
  Top Layer w0.254: MCU1.36@26.867,-55.296 26.867,-54.133 26.95,-54.05 R8.1@26.95,-53.025
NetMCU1_37: MCU1.37 R2.2 | length 35
  Top Layer w0.152: MCU1.37@26.367,-55.296 26.367,-52.91 25.781,-52.324 25.781,-51.181 26.416,-50.546 30.535,-50.546 36.377,-56.388 39.243,-56.388 41.656,-58.801 41.656,-68.17 40.78,-69.046 R2.2@40.328,-69.046
NetMCU1_38: MCU1.38 R2.1 | length 37.1
  Top Layer w0.152: MCU1.38@25.867,-55.296 25.867,-53.118 25.335,-52.585 25.335,-51.127 26.416,-50.046 30.742,-50.046 36.584,-55.888 39.243,-55.888 42.156,-58.801 42.156,-68.17 40.78,-69.546 R2.1@40.328,-69.546
NetMCU1_39: MCU1.39 R46.7 | length 26
  Top Layer w0.254: R46.7@22.15,-78.075 22.15,-78.45 22.4,-78.7 23.5,-78.7 23.9,-78.3 v1(23.9,-77.8) ; v1@25.367,-58.167 MCU1.39@25.367,-55.296
  Bottom Layer w0.254: v1(23.9,-77.8) 24.925,-76.775 24.925,-62.717 25,-62.643 25,-58.6 v1(25.4,-58.2)
NetMCU1_40: MCU1.40 R46.8 | length 25.1
  Top Layer w0.254: R46.8@21.65,-78.075 21.65,-76.95 22.4,-76.2 v1(24.3,-76.2) ; v1@24.867,-57.833 MCU1.40@24.867,-55.296
  Bottom Layer w0.254: v1(24.3,-76.2) 24.3,-58.4 v1(24.8,-57.9)
NetMCU1_41: MCU1.41 RF.7 | length 29.1
  Top Layer w0.254: v1(24.3,-56.5) 24.367,-56.432 MCU1.41@24.367,-55.296
  vertical w0.254: v1(33.6,-55.9) 33.6,-67.1 33.655,-67.155 v1(33.655,-67.818)
  Bottom Layer w0.254: v1(24.3,-56.5) 24.4,-56.5 24.4,-54.3 25.7,-53 30.7,-53 v1(33.6,-55.9) ; v1(33.655,-67.818) 33.655,-68.755 33.988,-69.088 35.285,-69.088
NetMCU1_42: MCU1.42 R56.2 R58.4 | length 51.4
  Top Layer w0.152: R58.4@24.605,-52.81 v1(24.903,-52.512) ; v1(24.903,-13.832) 30.414,-13.832 32.054,-15.472 32.464,-15.472 32.568,-15.576 32.568,-15.949 32.674,-15.949 R56.2@32.75,-16.025
  Top Layer w0.254: MCU1.42@23.867,-55.296 23.867,-54.433 24.605,-53.695 R58.4@24.605,-52.949
  vertical w0.152: v1(24.903,-52.512) 24.903,-49.621 24.308,-49.025 24.308,-48.257 24.562,-48.003 24.562,-29.848 24.308,-29.594 24.308,-28.826 24.904,-28.229 v1(24.903,-13.832)
NetMCU1_43: MCU1.43 R56.1 R58.3 | length 50.6
  Top Layer w0.152: v1(24.11,-52.787) R58.3@24.13,-52.767 ; v1(24.472,-14.263) v1@24.724,-14.263 ; v1@24.724,-14.263 25.082,-14.263 25.249,-14.097 29.972,-14.097 31.824,-15.949 32.174,-15.949 R56.1@32.25,-16.025
  Top Layer w0.254: MCU1.43@23.367,-55.296 23.367,-54.133 24.105,-53.395 R58.3@24.105,-52.949
  vertical w0.152: v1(24.11,-52.787) 24.11,-52.598 24.472,-52.236 24.472,-49.549 24.054,-49.131 24.054,-48.151 24.308,-47.897 24.308,-29.954 24.054,-29.7 24.054,-28.72 24.308,-28.466 24.308,-14.427 v1(24.472,-14.263)
NetMCU1_50: MCU1.50 RF.2 | length 25.7
  Top Layer w0.254: v1(17.5,-59) 17.5,-58.3 18.204,-57.596 MCU1.50@19.067,-57.596
  horizontal w0.254: v1(17.5,-59) 19.555,-59 19.955,-58.6 20.355,-58.6 20.4,-58.645 22.617,-58.645 22.645,-58.617 23.3,-58.617 23.683,-59 28.317,-59 28.4,-59.083 34.283,-59.083 v1(34.8,-59.6)
  Bottom Layer w0.254: v1(34.8,-59.6) 33.5,-60.9 33.5,-62.4 33.838,-62.738 35.285,-62.738
NetMCU1_51: MCU1.51 R45.6 | length 25.9
  Top Layer w0.254: MCU1.51@19.067,-58.096 21.396,-58.096 22.5,-59.2 22.5,-59.903 23.353,-60.756 24.033,-60.756 v1(25.839,-62.561) ; v1(26.9,-76.09) 27.497,-76.09 28.25,-76.843 R45.6@28.25,-78.075
  vertical w0.254: v1(25.839,-62.561) 25.839,-62.639 25.885,-62.685 25.885,-62.787 25.89,-62.792 25.89,-63.192 25.885,-63.198 25.885,-69.785 26.9,-70.8 v1(26.9,-76.09)
NetMCU1_52: MCU1.52 R45.7 | length 24.7
  Top Layer w0.254: MCU1.52@19.071,-58.6 20.6,-58.6 23.1,-61.1 23.194,-61.1 23.205,-61.111 23.527,-61.111 v1(25.408,-62.992) ; v1(26.9,-76.7) 27.4,-76.7 27.75,-77.05 R45.7@27.75,-78.075
  vertical w0.254: v1(25.408,-62.992) 25.485,-62.992 25.485,-64.841 25.529,-64.885 25.529,-70.136 26.544,-71.151 26.544,-75.764 26.417,-75.891 26.417,-76.29 26.827,-76.7 v1(26.9,-76.7)
NetMCU1_53: MCU1.53 R46.6 | length 23.4
  Top Layer w0.254: MCU1.53@19.081,-59.083 v1(20.155,-59.083) v1@20.317,-59.083 ; R46.6@22.65,-78.075 22.65,-76.85 22.747,-76.753 v1@23.72,-76.753
  Bottom Layer w0.254: v1(20.155,-59.083) 20.238,-59 21.103,-59 23.7,-61.597 v1(23.7,-76.8)
NetMCU1_54: MCU1.54 R46.5 | length 21.4
  Top Layer w0.254: MCU1.54@19.071,-59.6 v1(20.5,-59.6) ; R46.5@23.15,-78.075 v1(23.15,-77.25)
  Bottom Layer w0.254: v1(20.5,-59.6) 21.2,-59.6 23.15,-61.55 v1(23.15,-77.25)
NetMCU1_56: MCU1.56 R63.6 | length 13.5
  Top Layer w0.254: v1(11.5,-54.8) 11.9,-54.8 12.15,-54.55 R63.6@12.15,-53.725 ; v1(17.5,-60.49) 17.606,-60.596 MCU1.56@19.067,-60.596
  Bottom Layer w0.254: v1(11.5,-54.8) 11.4,-54.8 11.4,-57.597 14.403,-60.6 17.39,-60.6 v1(17.5,-60.49)
NetMCU1_57: MCU1.57 R63.5 | length 14.2
  Top Layer w0.254: v1(10.925,-53.725) R63.5@11.65,-53.725 ; v1(17.7,-61.1) 17.704,-61.096 MCU1.57@19.067,-61.096
  Bottom Layer w0.254: v1(10.925,-53.725) 10.925,-57.625 14.4,-61.1 v1(17.7,-61.1)